# EAGLE board PulverTech_v1 (EAGLE 9.4.2)
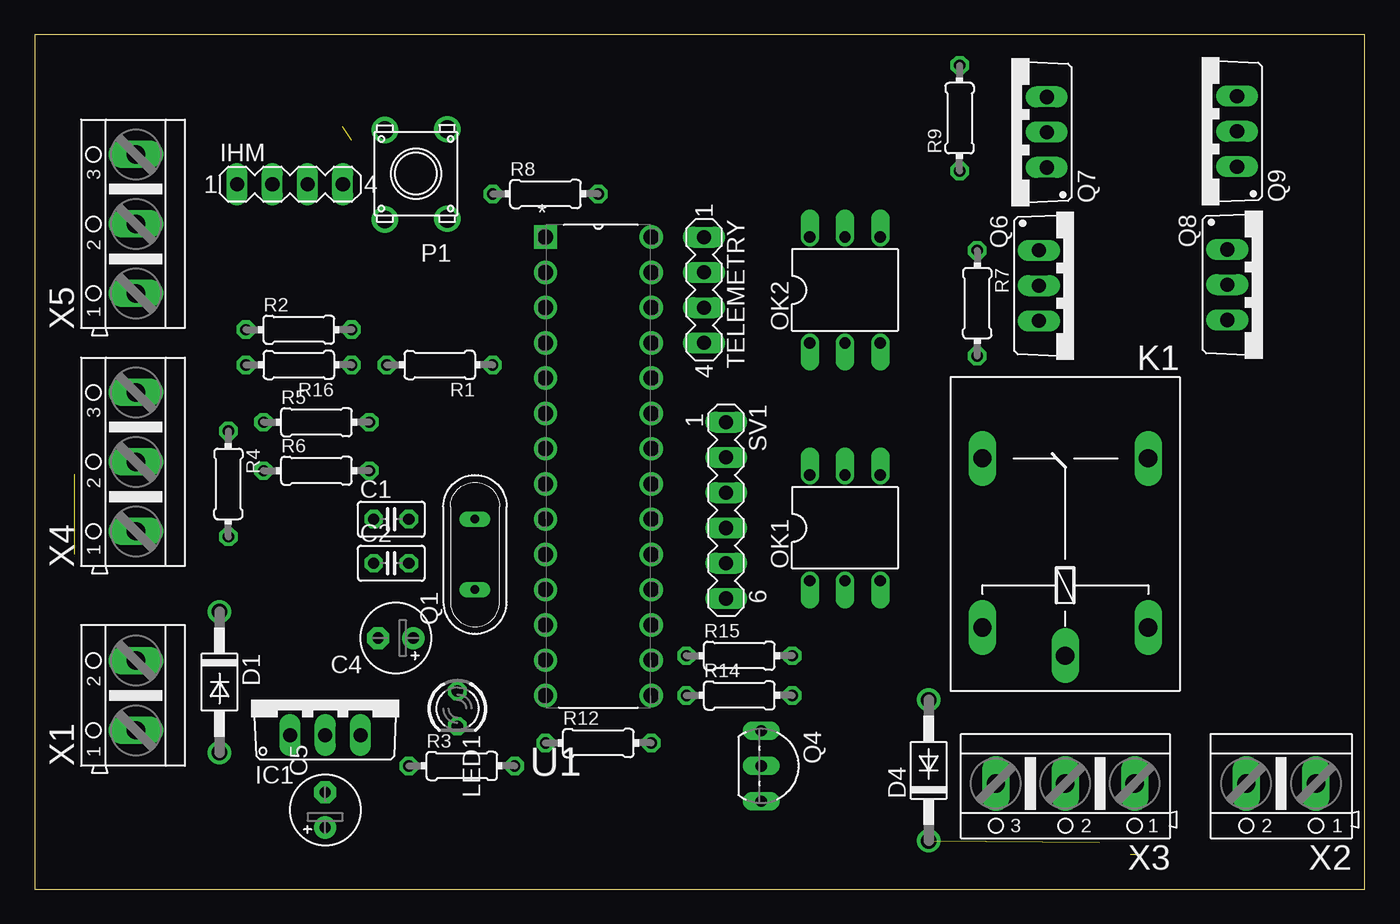
[diagram p0: board, top side]
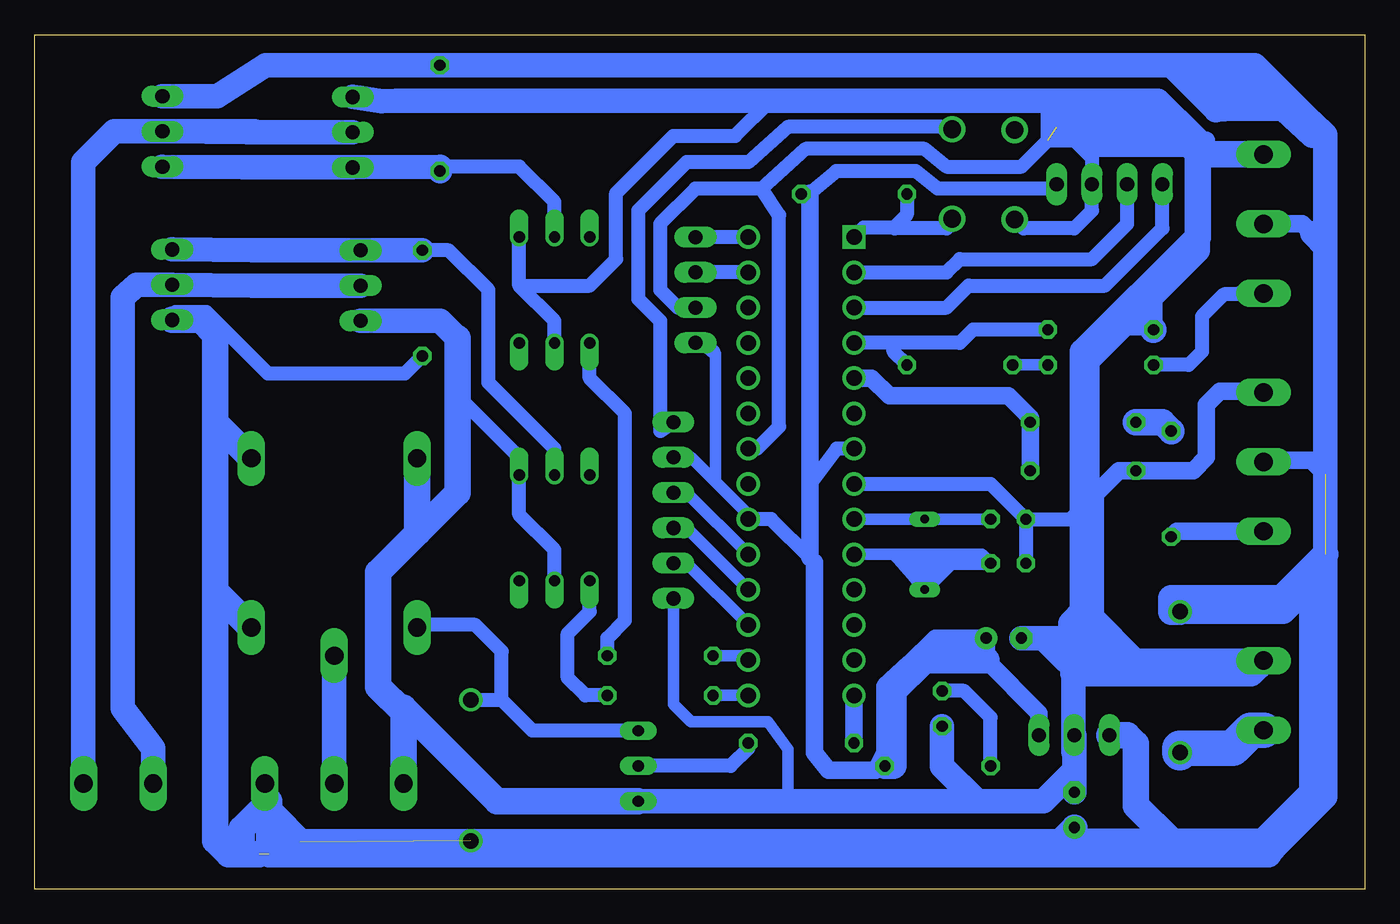
[diagram p1: board, bottom side, seen from below]

Size 95.87 x 61.58 mm. Coordinates in mm from the lower left corner, seen from the top.
Outline: 95.87,0 95.87,61.58 0,61.58 0,0 95.87,0
Copper layers (1*16): Top 0.035mm / dielectric 1.5mm / Bottom 0.035mm
Design rules "default": minimum track width 6mil, minimum drill 0.35mm, track to track 6mil, track to pad 6mil, pad to pad 6mil, via to via 6mil, smd to smd 6mil, copper to edge 40mil, drill to drill 6mil, minimum pad ring 10mil, minimum via ring 8mil, stop-mask expansion 4mil, vias tented up to drill 0mil, thermal gap 10mil
Net classes: 0 default: width 0.813 mm, drill 0.127 mm, clearance 0.051 mm

## Footprints (pad centres in the part's own frame; a part is rotated, then mirrored left to right if it is on the bottom)
C025-025X050 = drill 0.813 octagon: 1 -1.27,0; 2 1.27,0
E2,5-5 = drill 0.813 pad 1.6: + -1.27,0 | drill 0.813 pad 1.6 octagon: - 1.27,0
DO41-10 = drill 1.118: A 5.08,0; C -5.08,0
TO220V = drill 1.016 long: 1 -2.54,-2.54; 2 0,-2.54; 3 2.54,-2.54
MA04-1 = drill 1.016 long: 1 -3.81,0; 2 -1.27,0; 3 1.27,0; 4 3.81,0
G5LE = drill 1.321 long: 1 -7.493,-5.969; 2 -7.493,5.969; O 4.699,5.969; P -9.525,0; S 4.699,-5.969
LED3MM = drill 0.813 octagon: A -1.27,0; K 1.27,0
DIL06 = drill 0.813 offset: 1 -2.54,-3.81; 2 0,-3.81; 3 2.54,-3.81; 4 2.54,3.81; 5 0,3.81; 6 -2.54,3.81
FSMCD = drill 1.27: P$1 -2.25,3.25; P$2 -2.25,-3.2; P$3 2.25,3.3; P$4 2.25,-3.15
QS = drill 0.61 long: 1 -2.54,0; 2 2.54,0
TO92-EBC = drill 0.813 long: B 0,-1.27; C -2.54,-1.27; E 2.54,-1.27
TO220BV = drill 1.016 long: D 0,-2.54; G -2.54,-2.54; S 2.54,-2.54
0204/7 = drill 0.813 octagon: 1 -3.81,0; 2 3.81,0
MA06-1 = drill 1.016 long: 1 -6.35,0; 2 -3.81,0; 3 -1.27,0; 4 1.27,0; 5 3.81,0; 6 6.35,0
DIP254P762X457-28 = drill 1.118 square: 1 -7.62,33.02 | drill 1.118: 2 -7.62,30.48; 3 -7.62,27.94; 4 -7.62,25.4; 5 -7.62,22.86; 6 -7.62,20.32; 7 -7.62,17.78; 8 -7.62,15.24; 9 -7.62,12.7; 10 -7.62,10.16; 11 -7.62,7.62; 12 -7.62,5.08; 13 -7.62,2.54; 14 -7.62,0; 15 0,0; 16 0,2.54; 17 0,5.08; 18 0,7.62; 19 0,10.16; 20 0,12.7; 21 0,15.24; 22 0,17.78; 23 0,20.32; 24 0,22.86; 25 0,25.4; 26 0,27.94; 27 0,30.48; 28 0,33.02
AK500/2 = drill 1.321 long: 1 -2.515,0; 2 2.515,0
AK500/3 = drill 1.321 long: 1 -5.004,0; 2 0,0; 3 5.004,0

## Placement (x,y rotation side)
C1  22pf  [C025-025X050]  25.7,26.67 0 top
C2  22pf  [C025-025X050]  25.7,23.5 0 top
C4  100uF  [E2,5-5]  26.02,18.1 180 top
C5  100uF  [E2,5-5]  20.94,5.71 90 top
D1  1N4007  [DO41-10]  13.32,14.92 270 top
D4  1N4004  [DO41-10]  64.44,8.57 90 top
IC1  786TV  [TO220V]  20.94,13.65 0 top
IHM  [MA04-1]  18.4,50.8 0 top
K1  G5LE  [G5LE]  74.28,26.35 90 top
LED1  led  [LED3MM]  30.47,13.02 270 top
OK1  4N25M  [DIL06]  58.41,26.04 0 top
OK2  4N25M  [DIL06]  58.41,43.18 0 top
P1  FSMCD  [FSMCD]  27.48,51.56 180 top
Q1  16.0 mHz  [QS]  31.74,24.13 90 top
Q4  BC548  [TO92-EBC]  53.65,8.89 270 top
Q6  IRF540  [TO220BV]  74.92,43.5 270 top
Q7  IRF540  [TO220BV]  70.41,54.55 90 top
Q8  IRF9530  [TO220BV]  88.51,43.56 270 top
Q9  IRF9530  [TO220BV]  84.12,54.61 90 top
R1  10k  [0204/7]  29.2,37.78 180 top
R2  10k  [0204/7]  19.04,40.32 0 top
R3  1k  [0204/7]  30.79,8.89 0 top
R4  10k  [0204/7]  13.96,29.21 270 top
R5  10k  [0204/7]  20.31,33.66 0 top
R6  10k  [0204/7]  20.31,30.16 0 top
R7  10k  [0204/7]  67.93,42.23 270 top
R8  1k  [0204/7]  36.82,50.1 0 top
R9  10k  [0204/7]  66.66,55.56 90 top
R12  1k  [0204/7]  40.63,10.54 0 top
R14  1k  [0204/7]  50.79,13.97 0 top
R15  1k  [0204/7]  50.79,16.83 0 top
R16  10k  [0204/7]  19.04,37.78 180 top
SV1  [MA06-1]  49.84,27.3 270 top
TELEMETRY  [MA04-1]  48.25,43.18 270 top
U1  ATMEGA328P-PU  [DIP254P762X457-28]  44.44,13.97 0 top
X1  [AK500/2]  7.29,13.97 90 top
X2  [AK500/2]  89.84,7.62 180 top
X3  [AK500/3]  74.28,7.62 180 top
X4  [AK500/3]  7.29,30.8 90 top
X5  [AK500/3]  7.29,47.94 90 top

## Library data of the parts
C1 C2 = rcl
C4 C5 = resistor
D1 D4 = diode
IC1 = linear
IHM SV1 TELEMETRY = con-lstb; OC_FARNELL: unknown; OC_NEWARK: unknown
K1 = relay; OC_FARNELL: unknown; OC_NEWARK: unknown
LED1 = led
OK1 OK2 = optocoupler; MPN: 4N25-M; OC_FARNELL: 1021349; OC_NEWARK: 98K9084
P1 = switch-misc
Q1 = special
Q4 = transistor-npn
Q6-Q9 = transistor-power
R1-R9 R12 R14-R16 = eagle-ltspice; SPICEMODEL: NONE; SPICEPREFIX: R
U1 = Atmel_By_element14_Batch_1-00; MPN: ATMEGA328P-PU; OC_FARNELL: 1715487; OC_NEWARK: 15R0268; PACKAGE: PDIP-28; SUPPLIER: Atmel
X1-X5 = con-ptr500; OC_FARNELL: unknown; OC_NEWARK: unknown

## Nets
A2: U1.25
A3: U1.26
CS: U1.6
GND: C1.1 C2.1 C4.- C5.- IC1.2 IHM.3 K1.O LED1.K OK1.2 OK1.4 OK2.2 OK2.4 P1.P$3 Q4.E Q6.S Q7.S R2.1 R6.1 SV1.6 TELEMETRY.3 U1.8 U1.22 X1.2 X3.3 X4.3 X5.3
GND2: K1.P X3.2
MISO: SV1.4 U1.18
MOSI: SV1.5 U1.17
MOTOR_A: Q6.D Q8.D X2.2
MOTOR_B: Q7.D Q9.D X2.1
N$1: C1.2 Q1.2 U1.9
N$2: C2.2 Q1.1 U1.10
N$3: U1.11
N$4: R1.2 R16.1
N$5: D1.A X1.1
N$6: U1.12
N$8: R4.2 X4.1
N$9: LED1.A R3.1
N$11: U1.21
N$12: R16.2 X5.1
N$13: U1.23
N$14: U1.24
N$15: OK1.5 Q6.G Q8.G R7.1
N$16: OK1.1 R14.2
N$17: OK2.1 R15.2
N$31: R4.1 R5.1
N$33: D4.A K1.2 Q4.C
N$36: Q4.B R12.2
N$39: OK2.5 Q7.G Q9.G R9.1
RESET: P1.P$1 R8.1 U1.1
RST_ICSP: P1.P$2 SV1.1
S2_1: R12.1 U1.14
S2_2: U1.13
SCK: SV1.3 U1.19
SENSOR_FLUX: R1.1 R2.2 U1.4
SENSOR_IND: R5.2 R6.2 U1.5
SOFT_RX: TELEMETRY.2 U1.27
SOFT_TX: TELEMETRY.1 U1.28
U_RX: IHM.2 U1.2
U_TX: IHM.1 U1.3
V1_1: R14.1 U1.15
V1_2: R15.1 U1.16
VCC: C4.+ IC1.3 IHM.4 R3.2 R8.2 SV1.2 TELEMETRY.4 U1.7 U1.20
VIN: C5.+ D1.C D4.C IC1.1 K1.1 K1.S Q8.S Q9.S R7.2 R9.2 X3.1 X4.2 X5.2

## Tracks (layer width: path | path; a pad name or v marks a point on that pad's centre or on a via)
GND  (1 unrouted)
  Bottom 0.813: 41.58,6.35 41.58,10.08 43.02,12.06 48.57,12.06 49.84,13.34 SV1.6 | 23.16,18.1 21.31,18.1 | R2.1 17.77,40.32
  Bottom 1.016: U1.8 26.97,29.21 C1.1 | P1.P$3 24.6,47.63 20.94,47.63 20.94,47.62 19.67,48.9 IHM.3 19.67,52.7 20.94,53.98 22.85,53.98 | U1.22 43.8,31.75 42.22,33.34 42.22,48.58 43.48,50.48 | 43.48,50.48 40.31,53.34 31.74,53.34 30.15,52.07 24.75,52.07 22.85,53.98 | 43.48,50.48 48.25,50.48 50.79,47.94 50.79,43.18 49.52,41.91 TELEMETRY.3 | 22.85,53.98 22.85,56.72 22.96,56.83 | 11.73,53.66 12.05,53.98 | C1.1 C2.1 | C1.1 21.23,26.67 19.99,27.91 19.67,28.23 | OK2.2 58.41,40.96 60.95,43.5 | 60.95,43.5 OK2.4 | OK1.2 58.41,24.45 60.95,26.99 OK1.4 60.95,31.11 65.39,35.56 | 60.95,43.5 55.87,43.5 53.96,45.4 53.96,50.16 49.84,54.29 45.39,54.29 42.85,56.83
  Bottom 1.27: 23.87,6.6 24.12,6.35 | 50.15,6.35 41.58,6.35 27.94,6.35 | 11.42,53.98 11.73,53.66 | 7.37,35.8 X4.3 7.37,35.88 10.46,35.88 11.42,34.92 11.42,31.11 12.37,30.16 R6.1 17.74,30.16 19.67,28.23
  Bottom 1.778: 19.67,18.41 21,16.51 21,15.56 21,9.89 IC1.2 20.94,8.57 | 27.94,6.35 24.12,6.35 23.16,6.35 20.94,8.57 | 27.94,6.35 50.15,6.35 Q4.E | 23.16,18.1 C4.- 21.17,18.1 19.67,19.59 | 23.16,18.1 19.99,18.1 19.67,18.41 | LED1.K 30.47,8.88 27.94,6.35 | 19.67,19.59 19.67,18.41 | 19.67,28.23 19.67,19.59 | 19.99,27.91 19.99,38.1 17.77,40.32 15.54,42.55 12.05,46.04 12.05,52.7 | 12.05,53.02 12.05,53.98 14.91,56.83 22.96,56.83 | 22.96,56.83 42.85,56.83 69.84,56.83 70.85,56.77 Q7.S | 11.73,53.66 19.79,53.66 22.96,56.83 | 13.48,55.4 21.74,55.4 22.21,54.93 | 65.39,33.02 65.39,35.56 65.39,39.69 66.66,40.96 Q6.S | X1.2 16.56,16.48 | 16.56,16.48 19.67,19.59 | 16.56,16.48 21.55,16.48 23.16,18.1 | 19.67,18.41 19.36,18.41 18.4,17.46 | C5.- 20.94,8.57
  Bottom 1.9: X5.3 11.98,52.95 12.05,53.02 | 15.23,56.2 12.05,53.02 | 12.05,53.02 12.05,52.7 12.05,46.99 20.31,38.73 20.31,20 21.17,19.14 21.17,18.1 | X1.2 8.22,15.56 21,15.56 | R2.1 15.54,40.64 15.54,42.55 | Q4.E 62.54,6.35 69.28,13.09 69.28,12.78 | 68.25,25.72 71.11,22.86 71.11,14.61 69.28,12.78 | 68.25,25.72 65.39,28.57 65.39,39.69 | K1.O 68.31,25.78 68.25,25.72 | X3.3 69.28,12.46 69.28,12.78
GND2
  Bottom 1.778: 74.28,17.78 K1.P X3.2
MISO
  Bottom 0.813: U1.18 48.88,26.04 SV1.4
MOSI
  Bottom 0.813: U1.17 48.88,23.5 SV1.5
MOTOR_A
  Bottom 1.778: Q6.D 80.19,43.5 Q8.D 88.51,43.56 89.52,42.67 89.52,13.04 87.33,10.16 X2.2
MOTOR_B
  Bottom 1.778: 79.95,54.55 Q7.D | 79.95,54.55 80.57,54.55 Q9.D | 79.95,54.55 80.01,54.61 Q9.D | X2.1 92.38,7.33 92.38,52.39 90.16,54.61 Q9.D
N$1
  Bottom 0.813: U1.9 Q1.2 C1.2
N$2
  Bottom 0.813: U1.10 33.96,24.13 | 33.96,24.13 33.16,23.22 | 33.16,23.22 Q1.1 | 33.96,24.13 27.61,24.13 C2.2 | 29.52,23.81 32.56,23.81 33.16,23.22 | 33.16,23.22 32,23.22 32.34,22.87 32.34,22.28 31.63,22.99 30.34,22.99
  Bottom 1.016: C2.2 29.83,23.5 | 29.83,23.5 30.34,22.99 Q1.1 | 29.52,23.81 29.83,23.5
N$4
  Bottom 0.813: R16.1 R1.2
N$5
  Bottom 2.54: X1.1 8.22,11.46 9.51,10.16 13.32,10.16 D1.A
N$8
  Bottom 1.27: X4.1 13.56,25.79 R4.2
N$9
  Bottom 1.016: R3.1 26.97,12.38 28.88,14.29 LED1.A
N$12
  Bottom 1.016: R16.2 12.69,37.78 11.73,38.73 11.73,41.27 10.15,42.86 7.37,42.86 X5.1
  Bottom 1.27: X5.1 8.8,42.94
N$15
  Bottom 1.016: OK1.5 58.41,31.75 63.17,36.51 63.17,43.18 66.03,46.04 R7.1
  Bottom 1.778: Q8.G 80.19,46.04 Q6.G R7.1
N$16
  Bottom 1.016: R14.2 56.19,13.97 57.46,15.24 57.46,18.41 55.87,20 OK1.1
N$17
  Bottom 1.016: OK2.1 55.87,36.83 53.33,34.29 53.33,19.37 54.6,18.1 R15.2
N$31
  Bottom 1.9: R4.1 14.59,33.66 R5.1
N$33
  Bottom 1.016: Q4.C 60,11.43 62.22,13.65 | K1.2 68.27,19.05 64.12,19.05 62.22,17.14 62.22,13.65 | D4.A 62.22,13.65
N$36
  Bottom 1.016: R12.2 44.44,10.16 45.71,8.89 Q4.B
N$39
  Bottom 1.016: OK2.5 58.41,49.53 60.95,52.07 66.66,52.07
  Bottom 1.778: Q9.G 80.89,52.01 Q7.G 66.66,52.07 R9.1
RESET
  Bottom 1.016: 33.95,47.68 36.13,47.68 U1.1 | R8.1 33.01,48.62 33.95,47.68 | P1.P$1 29.73,48.04 30.15,47.62 33.89,47.62 33.95,47.68
RST_ICSP
  Bottom 1.016: P1.P$2 30.3,54.76 30.47,54.93 41.58,54.93 44.44,52.39 48.88,52.39 52.38,48.9 52.38,42.55 50.79,40.96 50.79,33.02 SV1.1
S2_1
  Bottom 1.27: U1.14 R12.1
SCK
  Bottom 0.813: U1.19 48.88,28.57 SV1.3
SENSOR_FLUX
  Bottom 1.016: 33.96,39.37 29.2,39.37 28.25,40.32 R2.2 | 33.96,39.37 U1.4 | R1.1 33.96,38.73 33.96,39.37
SENSOR_IND
  Bottom 1.27: R6.2 R5.2 24.12,33.97 25.7,35.56 34.28,35.56 35.55,36.83 U1.5
SOFT_RX
  Bottom 1.016: U1.27 TELEMETRY.2
SOFT_TX
  Bottom 1.016: U1.28 TELEMETRY.1
U_RX
  Bottom 1.016: U1.2 30.15,44.45 29.2,45.4 19.67,45.4 17.13,47.94 IHM.2
U_TX
  Bottom 1.016: U1.3 30.15,41.91 28.56,43.5 18.72,43.5 14.59,47.62 IHM.1
V1_1
  Bottom 0.813: U1.15 R14.1
V1_2
  Bottom 0.813: R15.1 44.76,16.83 U1.16
VCC
  Bottom 0.813: U1.20 44.44,26.99 46.82,29.37 | 46.82,29.37 48.57,31.11 SV1.2 | 46.82,29.37 46.82,38.58 46.98,38.73
  Bottom 1.016: U1.7 38.07,31.75 39.99,29.19 | U1.20 42.79,26.67 39.99,23.88 39.68,23.56 | IHM.4 22.53,50.48 30.79,50.48 32.37,51.75 38.09,51.75 39.99,50.16 | TELEMETRY.4 47.61,39.37 46.98,38.73 | 35.23,8.57 34.91,8.89 R3.2 34.91,8.57 36.18,8.57
  Bottom 1.27: 39.99,23.88 39.99,29.19 39.99,50.16 40.06,50.1 R8.2 | 39.68,23.56 39.68,9.84 38.66,8.57 36.18,8.57 35.23,8.57 34.6,9.84 34.6,14.63 32.79,16.28 30.97,18.1 C4.+ 27.29,16.51 23.48,12.7 IC1.3
  Bottom 1.9: 27.29,16.51 31.74,16.51 33.96,14.29 33.96,8.89 R3.2
VIN  (3 unrouted)
  Bottom 1.016: R7.2 69.2,37.15 79.05,37.15 83.49,41.59 85.71,41.59 85.71,41.27 Q8.S
  Bottom 1.27: 2.85,29.9 3.85,30.9 7.18,30.9 X4.2 | X5.2 4.49,47.94 3.8,47.25
  Bottom 1.778: 6.02,3.49 7.29,3.49 13.96,3.49 20.72,3.49 C5.+ | 6.02,3.49 6.97,2.54 | 2.84,23.03 2.84,6.67 6.02,3.49 | 2.84,23.03 2.84,24.13 2.84,46.3 2.85,46.3 | D1.C 5.87,20 2.84,23.03 | 2.85,46.3 3.8,47.25 | 2.85,46.3 2.85,54.37 3.8,55.25 | 4.72,56.04 3.8,55.25 | 4.72,56.17 4.72,56.04 | 4.72,56.17 3.96,55.4 12.1,58.58 10.72,56.14 10.78,56.2 | 4.72,56.17 7.92,59.37 13.96,59.37 | 13.96,59.37 10.78,56.2 | 3.8,55.25 3.8,54.3 8.24,58.42 13.96,59.37 | 10.78,56.2 10.13,56.2 10.39,56.25 5.15,56.25 4.72,56.04 | Q9.S 82.72,57.15 79.23,59.37 R9.2 13.96,59.37
  Bottom 1.9: 78.65,5.32 76.73,3.4 21.99,3.4 C5.+ | IC1.1 17.13,11.11 16.5,10.48 16.5,6.03 13.96,3.49 | 7.29,3.49 3.8,6.99 3.8,21.27 | D1.C 13.96,20 13.96,20.95 6.02,20.95 2.84,24.13 | 6.97,2.54 78.97,2.54 78.97,6.35 79.29,6.03 | 79.68,2.54 81.9,2.54 82.86,3.49 82.86,21.27 | Q8.S 83.87,41.02 82.86,40.01 82.86,33.66 | 82.86,21.27 82.86,33.66 | K1.S 82.86,33.66 | K1.1 82.67,21.27 82.86,21.27 | X3.1 79.29,6.03 | 79.29,6.03 80.95,4.37 80.95,3.49

## Text on the board
_tplace: 3 | 1 | 4 | 1 | * | 2 | 1 | 4 | 3 | 1 | 2 | 1 | 6 | 2 | 1 | 3 | 2 | 1 | 2 | 1